# Altium PCB THERMO_RTD_SENSOR_2CH.PcbDoc (part 3 of 3)
Units mm, origin at the board's own origin, x right, y up, seen from the top; angles counter-clockwise.
Board outline 24 x 76.5 mm, 4 copper layers (L1, P2, L3, L4), stack 1.512 mm thick; 154 components, 120 nets, 487 pads, 253 vias.
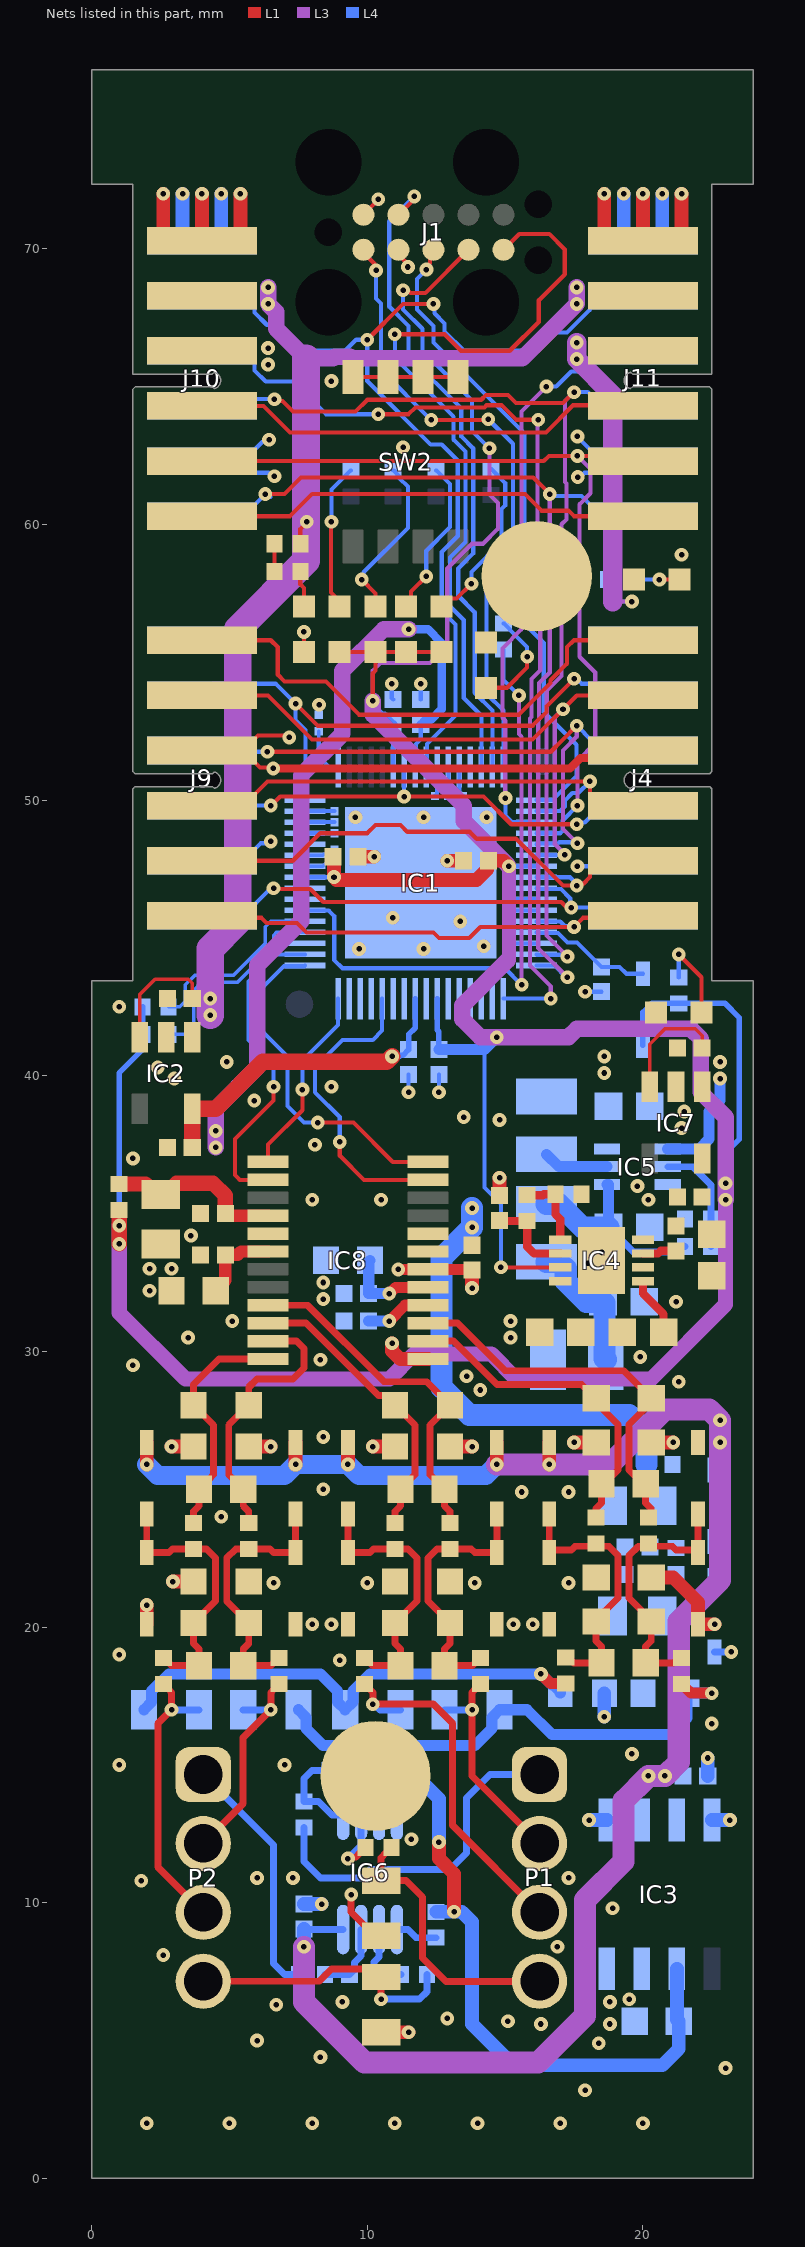
[diagram p4: the nets of this part, all layers, seen from the top]

## Via types
v1: diameter 0.5, hole 0.2, L1 to L4, tented both sides, 253 vias

## Nets (pads, with @x,y where several pads share a name; then routed paths per layer and width w, separated by ;. In a path a pad name is that pad's centre, name@x,y a point inside that pad or via, vN(x,y) a via of type N, cw(c..) or ccw(c..) an arc to the next point about the centre after c; other vN are vias at no path point) (continued)
GND: C1.1 C2.1 C3.1 C4.1 C5.1 C6.1 C7.1 C8.1 C9.1 C10.2 C11.1 C12.1 C13.1 C14.1 C15.1 C16.1 C17.1 C18.1 C19.1 C20.1 C23.2 C24.2 C25.2 C26.2 C28.2 C29.2 C32.1 C33.1 C34.2 C35.2 C36.1 C37.1 C38.2 C39.2 C40.2 C43.2 C44.2 C45.2 C46.1 C47.1 C48.2 C49.2 C52.1 C53.1 C231.1 C232.1 D3.2 D6.2 D7.2 D10.2 D11.2 D14.2 D15.2 IC1.65 IC2.2 IC3.1 IC3.4 IC3.7 IC3.8 IC4.4 IC4.9 IC5.3 IC6.4 IC7.2 IC8.1 IC8.6 IC8.17 J1.2 J1.10 J4.1 J4.5 J4.9 J9.1 J9.5 J9.9 J10.7 J10.11 J11.7 J11.11 LD1.1 LD26.1 LD27.1 LD28.1 MP1.1 MP2.1 NT1.2 NT2.2 NT3.2 NT4.2 NT5.2 NT6.2 NT7.2 NT8.2 NT9.2 NT10.2 NT11.2 NT12.2 R5.1 R8.1 R10.1 R16.1 R24.2 SW2.5 SW2.6 SW2.7 SW2.8 | length 74.5
  L1 w0.15: J9.9@4,51.8 J9.9@5.5,51.8 ; v1(6.585,51.15) 6.546,51.19 6.11,51.19 J9.9@5.5,51.8 ; v1(7.167,52.274) 7.104,52.338 6.038,52.338 J9.9@5.5,51.8 ; LD27.1@7.7,55.375 v1(7.7,56.1) ; SW2.8@9.485,65.35 SW2.5@13.295,65.35
  L1 w0.152: J1.10@9.86,71.235 9.86,71.247 10.4,71.787 v1(10.4,71.8) ; J1.2@11.13,69.965 11.13,69.79 11.409,69.511 11.409,69.407 v1(11.476,69.34)
  L1 w0.25: v1(9.414,10.295) 9.414,9.661 10.275,8.8 R10.1@10.5,8.8
  L1 w0.3: v1(6.585,51.15) 17.35,51.15 17.732,51.532 19.732,51.532 J4.9@20,51.8
  L1 w0.4: v1(11.125,32.975) IC8.6@12.2,32.975 13.775,32.975 C43.2@13.8,32.95
  L1 w0.5: D11.2@2,20.1 v1(2,20.8) ; v1(2.9,26.55) C47.1@3.7,26.55 ; v1(2.95,21.65) C46.1@3.7,21.65 ; C40.2@5.7,26.55 v1(6.5,26.55) ; C1.1@9.662,47.947 v1(10.253,47.947) ; v1(10.2,26.55) C33.1@11,26.55 ; R16.1@10.5,5.3 v1(11.5,5.3) ; v1(10.9,30.3) 10.9,30.018 11.193,29.725 IC8.1@12.2,29.725 ; v1(12.901,47.8) C3.1@13.493,47.8 ; C29.2@13,26.55 v1(13.8,26.55) ; v1(13.8,32.3) C43.2@13.8,32.95 ; C18.1@14.8,35.65 v1(14.8,36.3) ; v1(17.5,26.7) C53.1@18.3,26.7 ; C48.2@20.3,21.8 21.1,21.8 22,20.9 D14.2@22,20.1 v1(22.6,20.1) ; C49.2@20.3,26.7 v1(21.1,26.7)
  L4 w0.15: J9.5@4,47.8 5.5,47.8 6.133,48.433 6.427,48.433 v1(6.494,48.5) ; v1(10.888,54.224) 10.888,53.702 C4.1@10.94,53.65 ; v1(11.5,39.4) C232.1@11.5,40.05 ; C5.1@11.94,53.65 v1(11.94,54.224) ; v1(12.6,39.4) C2.1@12.6,40.05 ; v1(17.623,47.6) 19.8,47.6 J4.5@20,47.8 ; v1(17.9,43.05) C6.1@18.5,43.05
  L4 w0.152: v1(6.439,63.076) 6.373,63.009 6.209,63.009 5.5,62.3 J10.11@4,62.3 4.424,61.876 6.412,61.876 6.538,61.75 v1(6.632,61.75) ; v1(8.252,53.463) v1@8.318,53.396 ; v1(17.626,63.191) 17.626,63.174 18.5,62.3 J11.11@20,62.3 19.576,61.876 17.882,61.876 17.726,61.72 v1(17.632,61.72)
  L4 w0.25: D3.2@22.6,19.1 v1(23.2,19.1)
  L4 w0.5: J10.7@3.3,70.3 v1(3.3,72) ; J10.7@4.7,70.3 v1(4.7,72) ; C17.1@7.7,9.95 v1(8.35,9.95) ; v1(18.045,13) IC3.1@18.695,13 ; v1(18.6,16.75) R24.2@18.6,17.6 ; J11.7@19.3,70.3 v1(19.3,72) ; J11.7@20.7,70.3 v1(20.7,72) ; C10.2@22.35,14.6 v1(22.35,15.25) ; IC3.4@22.505,13 v1(23.155,13)
  other v1: 2,2 5,2 8,2 11,2 14,2 17,2 20,2 17.9,3.2 23,4 8.3,4.4 18.4,4.9 6,5 16.3,5.6 18.8,5.6 15.1,5.7 12.9,5.8 6.7,6.3 9.1,6.4 18.8,6.4 19.5,6.5 2.6,8.1 16.9,8.4 18.9,9.8 1.8,10.8 6,10.9 7.3,10.9 17.3,10.9 11.6,12.3 1,15 7,15 19.6,15.4 22.5,16.5 9,18.8 1,19 8,20.1 8.7,20.1 15.3,20.1 16,20.1 6.6,21.6 10,21.6 13.9,21.6 17.3,21.6 4.7,24 15.6,24.9 17.3,24.9 8.4,25 8.4,26.9 14.1,28.6 21.3,28.9 13.6,29.1 1.5,29.5 8.3,29.7 19.9,29.8 3.5,30.5 5.1,31.1 21.2,31.8 8.4,31.9 2.1,32.2 8.4,32.5 2.1,33 2.9,33 18,33.2 19,33.2 18.5,33.6 3.6,34.2 8,35.5 10.5,35.5 20.2,35.5 19.8,36 1.5,37 8.1,37.5 21.4,38.1 14.8,38.4 13.5,38.5 21.5,38.7 5.9,39.1 8.7,39.6 3,39.9 2.4,40.3 4.9,40.5 1,42.5 9.702,44.599 12.044,44.599 14.227,44.7 13.375,45.6 10.92,45.73 9.568,49.376 12.044,49.376 14.33,49.376 21.4,58.9 11.3,62.8 8.7,65.2
HSPI_AD0: IC1.22 J4.8 J9.8 | length 23.9
  L1 w0.15: J9.8@4,53.8 6.4,53.8 8,52.2 16,52.2 17.6,53.8 J4.8@20,53.8
  L3 w0.15: v1(17.1,53.3) 16.8,53 16.8,48.409 17.155,48.054 v1(17.155,48.018)
  L4 w0.15: IC1.22@16.14,48 16.149,48.009 17.146,48.009 v1(17.155,48.018)
HSPI_AD1: IC1.18 J4.10 J9.10 | length 19.5
  L1 w0.152: J9.10@4,49.8 5.5,49.8 6.377,50.677 v1(18.076,50.677) ; v1@18.075,50.65 18.076,50.649 18.076,50.224 18.5,49.8 J4.10@20,49.8
  L4 w0.152: IC1.18@16.14,49.6 16.998,49.6 17.17,49.772 17.17,49.988 17.435,50.253 17.651,50.253 v1@18.075,50.677
HSPI_AD2: IC1.28 J4.12 J9.12 | length 18.1
  L1 w0.152: J9.12@4,45.8 4.07,45.73 6.163,45.73 6.346,45.547 7.447,45.547 7.794,45.2 12.4,45.2 12.6,45 13.7,45 14.1,45.4 v1(17.5,45.4) 17.83,45.73 19.93,45.73 J4.12@20,45.8
  L4 w0.152: IC1.28@16.14,45.6 17,45.6 17.164,45.436 17.464,45.436 v1(17.5,45.4)
HSPI_AD3: IC1.21 J4.3 J9.3 | length 23
  L1 w0.152: v1(6.377,51.755) 16.655,51.755 17.085,52.185 v1(17.6,52.7)
  L3 w0.15: v1(17.6,52.7) 17.6,52.3 17.1,51.8 17.1,48.958 v1(17.625,48.433)
  L4 w0.15: v1(17.6,52.7) 17.62,52.7 17.883,52.437 17.883,52.417 18.5,51.8 J4.3@20,51.8
  L4 w0.152: J9.3@4,51.8 4.045,51.755 v1(6.377,51.755) ; IC1.21@16.14,48.4 16.164,48.424 16.92,48.424 16.967,48.471 17.587,48.471 v1(17.625,48.433)
HSPI_CLK: IC1.7 J4.4 J9.4 | length 16.5
  L1 w0.152: v1(6.494,49.8) 6.517,49.8 6.844,50.127 v1(11.334,50.127) 14.22,50.127 15.224,49.123 v1(17.6,49.123)
  L4 w0.152: J9.4@4,49.8 v1(6.494,49.8) ; v1(11.334,50.127) 11.337,50.13 11.337,51.197 IC1.7@11.34,51.2 ; v1(17.6,49.123) 17.667,49.19 17.89,49.19 18.5,49.8 J4.4@18.624,49.8
HSPI_CS0: IC1.25 J4.6 J9.6 | length 18.6
  L1 w0.152: v1(6.6,46.8) 6.627,46.773 7.93,46.773 8.404,46.3 17.037,46.3 17.17,46.167 17.333,46.167 v1(17.4,46.1)
  L4 w0.152: J9.6@4,45.8 5.5,45.8 6.433,46.733 6.533,46.733 v1(6.6,46.8) ; IC1.25@16.14,46.8 16.164,46.776 17.024,46.776 17.364,46.436 17.364,46.261 17.393,46.232 v1@17.4,46.232 ; v1@17.437,46.232 v1@17.4,46.232 ; J4.6@20,45.8 18.5,45.8 18.2,46.1 v1(17.4,46.1) v1@17.4,46.232
HSPI_ID: IC1.64 J4.2 J9.2 | length 21.5
  L1 w0.152: v1(7.4,53.5) 8.2,52.7 16,52.7 16.5,53.2 16.5,53.4 v1(17.5,54.4)
  L4 w0.152: J9.2@4,53.8 4.424,54.224 6.676,54.224 v1(7.4,53.5) 7.4,52.9 7.759,52.541 7.759,50.024 7.74,50.005 IC1.64@7.74,50 ; v1(17.5,54.4) 17.594,54.4 17.77,54.224 19.576,54.224 J4.2@20,53.8
HSPI_Q: IC1.24 J4.11 J9.11 | length 19.5
  L1 w0.152: J9.11@4,47.8 7.295,47.8 8.295,48.8 10,48.8 10.3,49.1 11.2,49.1 11.447,48.853 13.715,48.853 13.968,48.6 15.4,48.6 17.1,46.9 v1(17.6,46.9) 17.667,46.967 17.837,46.967 18.076,47.206 18.076,47.376 18.5,47.8 J4.11@20,47.8
  L4 w0.152: IC1.24@16.14,47.2 17.349,47.2 17.6,46.949 v1(17.6,46.9)
HSPI_sAD0: IC1.31 J10.10 J11.10 | length 39.4
  L1 w0.15: v1(6.632,64.545) 6.699,64.478 6.922,64.478 7.3,64.1 9.577,64.1 10,64.523 14.134,64.523 14.311,64.7 15.1,64.7 15.4,64.4 17.1,64.4 v1(17.5,64.8)
  L3 w0.15: v1(17.26,44.325) 16.5,45.085 16.5,52.774 16.508,52.782 16.508,53.968 17.048,54.507 17.048,60.009 17.223,60.184 17.223,61.489 17.171,61.541 17.171,64.471 v1(17.5,64.8)
  L4 w0.15: J10.10@4,64.3 4.245,64.545 v1(6.632,64.545) ; IC1.31@16.14,44.4 16.151,44.389 17.196,44.389 v1(17.26,44.325) ; v1(17.5,64.8) 18,64.8 18.5,64.3 J11.10@20,64.3
HSPI_sAD1: IC1.32 J10.12 J11.12 | length 36.8
  L1 w0.15: v1(6.3,61.1) 7,61.1 7.6,61.7 16.021,61.7 v1(16.621,61.1)
  L3 w0.152: v1(16.621,61.1) 16.621,54.635 16.23,54.244 16.23,52.898 16.2,52.867 16.2,44.635 v1(17.26,43.575)
  L4 w0.15: J10.12@4,60.3 5.5,60.3 v1(6.3,61.1) ; v1(16.621,61.1) 16.688,61.033 17.767,61.033 18.5,60.3 J11.12@20,60.3
  L4 w0.152: v1(6.3,61.1) 6.394,61.1 v1@6.494,61 ; IC1.32@16.14,44 16.79,44 17.215,43.575 v1(17.26,43.575)
Iexc_0: P1.1 R6.2 | length 12.4
  L4 w0.25: R6.2@7.7,12.73 7.7,11.5 8.3,10.9 9.8,10.9 10.1,11.2 13,11.2 13.6,11.8 13.6,13.8 14.45,14.65 P1.1@15.85,14.65
Iexc_1: P2.1 R11.2 | length 9
  L4 w0.25: 6.6,10.8 6.6,7.8 7,7.4 R11.2@7.53,7.4
  L4 w0.254: P2.1@4.05,14.65 6.6,12.1 6.6,10.8
Iexc_RET_0: P1.4 R9.2 R10.2 | length 9.9
  L1 w0.25: R9.2@10.87,12 10.87,11.98 10.705,11.815 10.685,11.815 10.5,11.63 R10.2@10.5,10.8 11.4,10.8 12,10.2 12,8 12.85,7.15
  L1 w0.254: 12.85,7.15 P1.4@16.25,7.15
Iexc_RET_1: P2.4 R15.2 R16.2 | length 9
  L1 w0.25: P2.4@5.05,7.15 8.25,7.15 8.7,7.6 10.5,7.6 v1@10.5,6.6
  L4 w0.25: v1(10.5,6.5) 11.9,6.5 12.17,6.77 R15.2@12.17,7.4
IO0: IC1.34
IO1: IC1.35
IO2: IC1.36
IO3: IC1.37
IO4: IC1.38
IO5: IC1.40
IO6: IC1.42
IO7: IC1.43
MODBUS_A: J10.4 J11.4 | length 16.8
  L1 w0.152: J10.4@4,64.3 6.236,64.3 7.195,63.341 16.482,63.341 17.467,64.326 19.974,64.326 J11.4@20,64.3
MODBUS_B: J10.6 J11.6 | length 16.7
  L1 w0.152: J10.6@4,60.3 7.2,60.3 8,61.1 15.725,61.1 16.325,60.5 17.3,60.5 17.5,60.3 J11.6@20,60.3
NetC15_2: C15.2 IC5.4 L1.1 R3.2 | length 7.4
  L4 w0.25: C15.2@18.75,34.5 19.65,33.6 20.9,33.6 21.1,33.8 R3.2@21.53,33.8
  L4 w0.4: IC5.4@18.7,36.05 18.75,36.05 C15.2@18.75,34.5
  L4 w0.8: L1.1@16.5,35.35 16.95,35.35 17.8,34.5 C15.2@18.75,34.5
NetC16_2: C16.2 L1.2 L3.1 | length 5.1
  L4 w0.8: L1.2@16.5,33.25 16.95,33.25 17.2,33 17.2,32.55 17.95,31.8 C16.2@18.55,31.8 18.6,31.75 18.6,29.75 L3.1@18.65,29.7
NetC18_2: C18.2 IC4.6 R4.2 | length 3.2
  L1 w0.3: C18.2@14.8,34.75 14.82,34.73 R4.2@15.8,34.73 15.8,33.8 16.05,33.55 IC4.6@17,33.55
NetC19_2: C19.2 IC4.3 | length 1.2
  L1 w0.3: IC4.3@20,33.55 20.55,33.55 20.65,33.65 C19.2@21.2,33.65
NetC20_2: C20.2 IC4.1 | length 2.2
  L1 w0.3: IC4.1@20,32.55 20,32.1 20.75,31.35 C20.2@20.75,30.7
NetC21_1: C21.1 IC6.2 R9.1 | length 4.3
  L1 w0.25: v1(9.3,11.6) 9.348,11.648 9.578,11.648 9.745,11.815 9.765,11.815 9.93,11.98 R9.1@9.93,12
  L4 w0.25: v1(9.3,11.6) 9.775,12.075 IC6.2@9.775,13.175 9.775,14.125 9.55,14.35 C21.1@9.55,14.8
NetC21_2: C21.2 IC6.1 R6.1 | length 3.5
  L4 w0.25: C21.2@8.65,14.8 8,14.8 7.7,14.5 R6.1@7.7,13.67 8.23,13.67 8.725,13.175 IC6.1@9.125,13.175
NetC22_1: C22.1 IC6.6 R15.1 | length 2.7
  L4 w0.25: IC6.6@10.425,9.025 10.425,8.025 10.25,7.85 C22.1@10.25,7.4 R15.1@11.23,7.4
NetC22_2: C22.2 IC6.7 R11.1 | length 2.7
  L4 w0.25: R11.1@8.47,7.4 C22.2@9.35,7.4 9.535,7.585 9.535,7.835 9.775,8.075 IC6.7@9.775,9.025
NetC28_1: C28.1 C30.1 D4.2 D6.1 R19.2 R20.1 | length 9.8
  L1 w0.25: R19.2@14.1,18.87 14.08,18.87 13.81,18.6 C30.1@12.8,18.6 12.8,19.2 13,19.4 C28.1@13,20.15 12.2,20.95 12.2,22.5 12.53,22.83 R20.1@13,22.83 13.77,22.83 13.9,22.7 D6.1@14.7,22.7 D4.2@14.7,24.1
NetC29_1: C29.1 C31.1 IC8.21 R20.2 | length 13
  L1 w0.25: IC8.21@6.4,31.675 7.825,31.675 10.6,28.9 12.15,28.9 C29.1@13,28.05 12.273,27.323 12.273,27.129 12.273,25.527 12.45,25.35 C31.1@12.8,25 12.8,24.4 13,24.2 R20.2@13,23.77
NetC30_2: C30.2 C32.2 D5.2 D7.1 R21.2 R22.1 | length 9.8
  L1 w0.25: D5.2@9.3,24.1 D7.1@9.3,22.7 10.1,22.7 10.23,22.83 R22.1@11,22.83 11.47,22.83 11.8,22.5 11.8,20.95 C32.2@11,20.15 11,19.4 11.2,19.2 C30.2@11.2,18.6 10.19,18.6 9.92,18.87 R21.2@9.9,18.87
NetC31_2: C31.2 C33.2 IC8.22 R22.2 | length 10.7
  L1 w0.25: IC8.22@6.4,31.025 7.775,31.025 10.4,28.4 10.65,28.4 11.727,27.323 11.727,27.129 11.727,25.527 11.55,25.35 C31.2@11.2,25 11.2,24.4 11,24.2 R22.2@11,23.77
NetC34_1: C34.1 C36.2 IC8.5 | length 3.5
  L1 w0.4: v1(10.8,32.1) 11.025,32.325 IC8.5@12.2,32.325
  L4 w0.4: C36.2@10.1,33.3 10.053,33.253 10.053,32.103 C34.1@10.05,32.1 v1(10.8,32.1)
NetC35_1: C35.1 IC8.4 | length 2.4
  L1 w0.4: v1(10.8,31.1) 11.375,31.675 IC8.4@12.2,31.675
  L4 w0.4: C35.1@10.05,31.1 v1(10.8,31.1)
NetC37_2: C37.2 C38.1 IC8.18 | length 3
  L1 w0.45: C37.2@4.5,32.2 4.5,32.225 4.85,32.575 C38.1@4.85,33.5 5.3,33.5 5.425,33.625 IC8.18@6.4,33.625
NetC39_1: C39.1 C41.1 D8.2 D10.1 R28.2 R29.1 | length 9.8
  L1 w0.25: R28.2@6.8,18.87 6.78,18.87 6.51,18.6 C41.1@5.5,18.6 5.5,19.2 5.7,19.4 C39.1@5.7,20.15 4.9,20.95 4.9,22.5 5.23,22.83 R29.1@5.7,22.83 6.47,22.83 6.6,22.7 D10.1@7.4,22.7 D8.2@7.4,24.1
NetC40_1: C40.1 C42.1 IC8.23 R29.2 | length 9.9
  L1 w0.25: R29.2@5.7,23.77 5.7,24.2 5.5,24.4 C42.1@5.5,25 5.15,25.35 4.973,25.527 4.973,27.129 4.973,27.323 C40.1@5.7,28.05 5.7,28.7 6,29 7.3,29 7.7,29.4 7.7,30.1 7.425,30.375 IC8.23@6.4,30.375
NetC41_2: C41.2 C46.2 D9.2 D11.1 R31.2 R34.1 | length 9.8
  L1 w0.25: D9.2@2,24.1 D11.1@2,22.7 2.8,22.7 2.93,22.83 R34.1@3.7,22.83 4.17,22.83 4.5,22.5 4.5,20.95 C46.2@3.7,20.15 3.7,19.4 3.9,19.2 C41.2@3.9,18.6 2.89,18.6 2.62,18.87 R31.2@2.6,18.87
NetC42_2: C42.2 C47.2 IC8.24 R34.2 | length 8.7
  L1 w0.25: R34.2@3.7,23.77 3.7,24.2 3.9,24.4 C42.2@3.9,25 4.25,25.35 4.427,25.527 4.427,27.129 4.427,27.323 C47.2@3.7,28.05 3.7,28.8 4.625,29.725 IC8.24@6.4,29.725
NetC48_1: C48.1 C50.2 D12.2 D14.1 R36.2 R37.1 | length 9.8
  L1 w0.25: R36.2@21.4,18.97 21.38,18.97 21.11,18.7 C50.2@20.1,18.7 20.1,19.3 20.3,19.5 20.3,20.25 19.5,21.05 19.5,22.6 19.83,22.93 20.3,22.93 21.07,22.93 21.2,22.8 22,22.8 D12.2@22,24.2
NetC49_1: C49.1 C51.2 IC8.3 R37.2 | length 14.2
  L1 w0.25: IC8.3@12.2,31.025 13.275,31.025 15,29.3 19.3,29.3 19.925,28.675 19.925,28.65 20.275,28.3 C49.1@20.3,28.3 ; R37.2@20.3,23.87 20.3,24.3 20.1,24.5 20.1,25.1 19.75,25.45 19.5,25.7 19.5,27.35 C49.1@20.3,28.15
NetC50_1: C50.1 C52.2 D13.2 D15.1 R38.2 R39.1 | length 9.8
  L1 w0.25: D13.2@16.6,24.2 16.6,22.8 17.4,22.8 17.53,22.93 18.3,22.93 18.77,22.93 19.1,22.6 19.1,21.05 18.3,20.25 18.3,19.5 18.5,19.3 C50.1@18.5,18.7 17.49,18.7 17.22,18.97 R38.2@17.2,18.97
NetC51_1: C51.1 C53.2 IC8.2 R39.2 | length 11.9
  L1 w0.25: IC8.2@12.2,30.375 13.125,30.375 14.7,28.8 17.779,28.8 17.925,28.654 17.925,28.65 18.275,28.3 C53.2@18.3,28.3 ; R39.2@18.3,23.87 18.3,24.3 18.5,24.5 18.5,25.1 18.85,25.45 19.1,25.7 19.1,27.35 C53.2@18.3,28.15
NetIC4_5: IC4.5 R4.1 R8.2 | length 2.8
  L1 w0.3: R4.1@15.8,35.67 16.37,35.67 16.4,35.7 R8.2@16.83,35.7 16.83,34.97 17,34.8 IC4.5@17,34.05
NetIC5_2: IC5.2 R3.1 R5.2 | length 4.1
  L4 w0.25: IC5.2@20.9,36.7 21.8,36.7 22.47,36.03 R5.2@22.47,34.8 R3.1@22.47,33.8
NetIC5_5: IC5.5 L2.2 | length 2.4
  L4 w0.4: L2.2@16.5,37.15 16.95,36.7 IC5.5@18.7,36.7
NetIC6_3: IC6.3 R7.2 | length 1.7
  L4 w0.25: IC6.3@10.425,13.175 10.425,14.125 10.63,14.33 R7.2@10.63,14.8
NetIC6_5: IC6.5 R14.2 | length 1.5
  L4 w0.25: IC6.5@11.075,9.025 11.475,9.025 11.77,8.73 R14.2@12.5,8.73
NetLD1_2: LD1.2 R1.1 | length 3.8
  L1 w0.15: LD1.2@14.3,54.075 15.062,54.075 15.8,54.813 v1(15.8,55.2)
  L4 w0.15: R1.1@14.94,56.411 14.96,56.411 15.175,56.196 15.175,56.176 15.8,55.551 v1(15.8,55.2)
NetLD18_1: LD18.1 R26.1 | length 6.3
  L1 w0.15: LD18.1@12.7,57.025 12.983,57.308 13.235,57.308 v1(13.776,57.85)
  L4 w0.15: v1(13.776,57.85) 13.776,58.276 14.873,59.373 14.873,60.558 15.003,60.688 15.003,61.435 15.003,61.51 14.511,62.002 R26.1@14.491,62.002
NetLD19_1: LD19.1 R27.1 | length 5.8
  L1 w0.15: LD19.1@11.4,57.025 11.586,57.211 11.586,57.562 v1(12.14,58.116)
  L4 w0.15: v1(12.14,58.116) 12.14,59.04 13.004,59.904 13.004,60.645 13.005,60.646 13.005,61.468 12.513,61.96 R27.1@12.493,61.96
NetLD20_1: LD20.1 R32.1 | length 6.1
  L1 w0.15: v1(9.8,58) 10.3,57.5 LD20.1@10.3,57.025
  L4 w0.15: v1(9.8,58) 9.867,58.067 9.867,58.267 11.474,59.874 11.474,61.371 11.175,61.67 11.175,61.745 10.96,61.96 R32.1@10.94,61.96
NetLD21_1: LD21.1 R33.1 | length 5.4
  L1 w0.15: v1(8.7,60.1) 8.69,60.09 8.69,57.535 LD21.1@9.18,57.045
  L4 w0.15: v1(8.7,60.1) 8.7,61.266 9.394,61.96 R33.1@9.414,61.96
NetLD26_2: LD26.2 R46.1 | length 3.3
  L1 w0.15: v1(21.3,44.4) 22.125,43.575 LD26.2@22.125,42.3
  L4 w0.15: R46.1@21.3,43.57 v1(21.3,44.4)
NetLD27_2: LD27.2 R48.1 | length 1.3
  L1 w0.15: R48.1@7.57,58.3 7.57,57.83 7.7,57.7 LD27.2@7.7,57.025
NetLD28_2: LD28.2 R2.2 | length 1.7
  L1 w0.15: v1(20.6,58) LD28.2@21.325,58
  L4 w0.15: R2.2@19.67,58 v1(20.6,58)
NetR47_1: R47.1 R48.2 | length 1
  L1 w0.15: R48.2@6.63,58.3 R47.1@6.63,59.3
P1V2_REFC: C11.2 IC3.6 R7.1 R14.1 | length 22.2
  L1 w0.5: v1(12.6,12.2) 12.6,11.6 13.15,11.05 v1(13.15,9.67)
  L4 w0.5: R7.1@11.57,14.8 11.57,14.78 11.61,14.74 11.63,14.74 12.6,13.77 v1(12.6,12.2) ; R14.1@12.5,9.67 v1(13.15,9.67) 13.43,9.67 13.8,9.3 13.8,5.6 15.3,4.1 20.7,4.1 21.3,4.7 C11.2@21.3,5.7 21.235,5.765 IC3.6@21.235,7.6
P1V8: C5.2 C9.2 C232.2 IC1.8 IC1.41 IC2.5 | length 40.7
  L1 w0.6: C9.2@3.65,37.4 IC2.5@3.65,38.8 4.5,38.8 6.2,40.5 10.7,40.5 v1(10.9,40.7)
  L3 w0.6: v1(4.5,37.4) v1(4.5,38) 4.5,38.8 6,40.3 6,44 7.6,45.6 7.6,50.9 9.1,52.4 9.1,54.7 10.6,56.2 v1(11.5,56.2)
  L4 w0.152: IC1.8@11.74,51.2 11.764,51.224 11.764,52.035 11.94,52.211 C5.2@11.94,52.75
  L4 w0.2: v1(10.9,40.7) 11.173,40.7 11.213,40.74 11.29,40.74 C232.2@11.5,40.95 11.5,41.5 11.74,41.74 IC1.41@11.74,42.8
  L4 w0.3: v1(11.5,56.2) 12.2,56.2 12.7,55.7 12.7,53.3 12.31,52.91 12.1,52.91 C5.2@11.94,52.75
P3V3: C1.2 C2.2 C3.2 C4.2 C7.2 D1.1 IC1.6 IC1.23 IC1.39 IC1.57 IC4.7 IC7.5 J1.4 LD18.2 LD19.2 LD20.2 LD21.2 R30.2 R40.1 R41.1 R46.2 | length 137.8
  L1 w0.15: LD21.2@9,55.375 LD20.2@10.3,55.375 LD19.2@11.4,55.375 LD18.2@12.7,55.375 ; v1(10.2,53.6) 10.2,54.6 10.3,54.7 LD20.2@10.3,55.395 ; v1(14.85,33.05) IC4.7@17,33.05
  L1 w0.152: v1(11.3,68.5) 11.367,68.433 11.53,68.433 11.563,68.4 12.105,68.4 J1.4@13.67,69.965
  L1 w0.5: C3.2@14.393,47.8 14.94,47.8 v1(15.14,47.6)
  L1 w0.508: C1.2@8.762,47.947 8.792,47.916 v1(8.792,47.206) 8.889,47.109 13.96,47.109 14.337,47.485 C3.2@14.337,47.744
  L1 w0.55: v1(1,33.9) v1(1,34.565) R30.2@1,35.13
  L3 w0.15: v1(10.2,53.6) 10.2,54.7 10.48,54.98 12.28,54.98 12.9,55.6 12.9,58.4 13.8,59.3 14.2,59.3 14.747,59.847 14.747,60.778 14.43,61.095
  L3 w0.152: 14.43,61.095 v1(14.43,62.761)
  L3 w0.516: 15.14,44.24 v1(15.14,47.6)
  L3 w0.55: v1(1,34.565) v1(1,33.9) 1,31.4 3.4,29 10.8,29 11.7,29.9 14.5,29.9 15.4,29 20.3,29 23,31.7 v1(23,35.5)
  L3 w0.6: v1(10.2,53.6) 10.2,53.1 13.5,49.8 13.5,49.24 v1@15.098,47.642 ; 15.098,44.198 13.449,42.549 13.449,42.051 14.1,41.4 v1(14.7,41.4) 17.3,41.4 17.6,41.7 21.749,41.7 22.1,41.349 22.1,39.4 23,38.5 v1(23,36.1) v1(23,35.5)
  L4 w0.15: IC1.57@7.74,47.2 7.743,47.203 8.79,47.203 v1(8.792,47.206) ; IC1.6@10.94,51.2 C4.2@10.94,52.75 ; 14.25,40.95 14.25,35.95 14.85,35.35 v1(14.85,33.05) ; v1(15.14,47.6) IC1.23@16.14,47.6
  L4 w0.152: v1(11.3,68.5) 11.3,67.8 12,67.1 12,66.3 13.8,64.5 13.8,63.392 v1(14.43,62.761)
  L4 w0.2: v1(1,34.565) 1,40.1 1.85,40.95 R40.1@1.85,42.5 ; IC1.39@12.54,42.8 12.54,41.66 12.6,41.6 C2.2@12.6,40.95 ; D1.1@20,41.1 20,42.3 20.33,42.63 R46.2@21.3,42.63 22.97,42.63 23.5,42.1 23.5,37.7 23,37.2 v1(23,36.1) v1(23,35.5)
  L4 w0.3: v1(10.2,53.6) 10.2,53.378 10.515,53.063 10.627,53.063 C4.2@10.94,52.75
  L4 w0.4: C2.2@12.6,40.95 14.25,40.95 v1(14.7,41.4)
P3V3DVDD: C44.1 C45.1 IC8.16 R30.1 | length 6.6
  L1 w0.45: C44.1@4.85,35 4.925,34.925 IC8.16@6.4,34.925
  L1 w0.55: R30.1@1,36.07 1.955,36.07 2.325,35.7 C45.1@2.5,35.7 2.675,35.7 3.075,36.1 4.4,36.1 4.85,35.65 C44.1@4.85,35
P5V0: C8.2 C14.2 C231.2 IC2.1 IC2.3 IC5.1 IC5.6 IC7.1 IC7.3 J10.2 J11.2 L2.1 R47.2 | length 53.1
  L1 w0.127: IC2.3@1.75,41.4 1.75,42.95 2.3,43.5 3.5,43.5 3.65,43.35 C8.2@3.65,42.8 ; IC7.3@20.25,39.6 20.25,41.15 20.8,41.7 21.9,41.7 22.15,41.45 C231.2@22.15,41
  L1 w0.15: R47.2@7.57,59.3 7.57,59.837 7.8,60.067 v1(7.8,60.1)
  L3 w0.6: v1(6.4,68.6) v1(6.4,68) 6.692,67.708 6.692,67.108 7.777,66.023 8.766,66.023 8.82,66.077 9.38,66.077 9.434,66.023 15.623,66.023 v1(17.6,68) v1(17.6,68.6)
  L3 w1: v1(4.3,42.2) v1(4.3,42.8) 4.3,44.6 5.3,45.6 5.3,56.2 7.777,58.677 7.777,66.023
  L4 w0.4: IC5.1@20.9,37.35 22.05,37.35 22.4,37.7 22.4,38.7 22.8,39.1 v1(22.8,39.9)
  other v1: 18.6,40.1 22.8,40.5 18.6,40.7
P5V0A: C10.1 C13.2 C17.2 D2.1 D4.1 D5.1 D8.1 D9.1 D12.1 D13.1 IC3.2 IC3.3 IC4.2 IC6.8 R13.2 | length 66.3
  L1 w0.5: v1(2,25.9) D9.1@2,26.7 ; v1(7.4,25.9) D8.1@7.4,26.7 ; v1(9.3,25.9) D5.1@9.3,26.7 ; v1(14.7,25.9) D4.1@14.7,26.7 ; v1(16.6,25.9) D13.1@16.6,26.7
  L3 w0.8: v1(7.7,8.4) 7.7,6.4 9.9,4.2 16.2,4.2 17.9,5.9 17.9,10.1 19.3,11.5 19.3,13.7 v1(20.2,14.6) v1(20.8,14.6) 21.3,15.1 21.3,20.2 22.8,21.7 v1(22.8,26.7) v1(22.8,27.5) 22.4,27.9 20.8,27.9 18.8,25.9 v1(16.6,25.9) v1(14.7,25.9)
  L4 w0.25: C17.2@7.7,9.05 7.725,9.025 IC6.8@9.125,9.025
  L4 w0.5: v1(7.7,8.4) C17.2@7.7,9.05
  L4 w0.7: v1(2,25.9) 2.4,25.5 7,25.5 v1(7.4,25.9) v1(9.3,25.9) 9.7,25.5 14.3,25.5 v1(14.7,25.9)
P5V0AVDD: C24.1 C25.1 C43.1 D2.2 D3.1 IC8.7 IC8.8 R12.2 R13.1 | length 16.2
  L4 w0.8: v1(13.8,35.2) v1(13.8,34.5) 12.7,33.4 12.7,28.7 13.7,27.7 19.5,27.7 20.13,27.07 R13.1@20.13,25.9
P6V0A: C12.2 IC4.8 L3.2
  other v1: 15.2,30.5 15.2,31.1
P12V0: J10.1 J10.3 J11.1 J11.3 R2.1 | length 22.4
  L1 w0.5: J10.1@2.6,70.3 v1(2.6,72) ; J10.1@4,70.3 v1(4,72) ; J10.1@5.4,70.3 v1(5.4,72) ; J11.1@18.6,70.3 v1(18.6,72) ; J11.1@20,70.3 v1(20,72) ; J11.1@21.4,70.3 v1(21.4,72)
  L3 w0.15: 18.9,57.2 v1(19.6,57.2)
  L3 w0.7: v1(17.6,66.6) v1(17.6,66) 18.9,64.7 18.9,57.2
  L4 w0.15: R2.1@18.73,58 18.73,57.47 19,57.2 v1(19.6,57.2)
  other v1: 6.4,65.8 6.4,66.4
PROJECT_ID0: IC1.55
PROJECT_ID1: IC1.56
PROJECT_ID2: IC1.58 NT8.1 | length 1.1
  L4 w0.127: IC1.58@7.74,47.6 8.39,47.6 8.5,47.71 8.569,47.71 8.609,47.75 NT8.1@8.814,47.75
PROJECT_ID3: IC1.59 NT12.1 | length 1.2
  L4 w0.127: IC1.59@7.74,48 8.39,48 8.427,48.037 8.531,48.037 8.585,48.091 8.653,48.091 8.676,48.114 8.728,48.114 NT12.1@8.814,48.2
PROJECT_ID4: IC1.60
PROJECT_ID5: IC1.61 NT9.1 | length 1.1
  L4 w0.15: IC1.61@7.74,48.8 NT9.1@8.814,48.8
PROJECT_ID6: IC1.62 NT10.1 | length 1.1
  L4 w0.15: IC1.62@7.74,49.2 NT10.1@8.814,49.2
PROJECT_ID7: IC1.63 NT11.1 | length 1.1
  L4 w0.15: IC1.63@7.74,49.6 NT11.1@8.814,49.6
RESETn_I: IC1.33 J10.9 | length 36.9
  L1 w0.15: v1(10.4,64) 11.5,64 11.746,64.246 14.248,64.246 14.329,64.326 14.874,64.326 15.4,63.8 v1(16.2,63.8)
  L3 w0.15: v1(16.2,63.8) 16.169,63.769 16.169,56.877 16.277,56.77 16.277,54.717 15.952,54.392 15.952,53.013 15.9,52.961 15.9,44 16.657,43.243 v1(16.657,42.8)
  L4 w0.15: J10.9@4,66.3 5.484,66.3 5.909,65.875 5.909,65.591 6.317,65.183 7.317,65.183 8.5,64 v1(10.4,64) ; IC1.33@14.94,42.8 v1(16.657,42.8)
RESETn_O: IC1.19 J11.9 | length 20.1
  L3 w0.15: v1(15.013,50.073) 15.007,50.079 15.007,52.88 14.9,52.987 14.9,55.5 15.6,56.2 15.6,64.1 v1(16.5,65)
  L4 w0.15: v1(15.013,50.073) 15.013,49.44 15.176,49.276 15.253,49.2 IC1.19@16.14,49.2 ; v1(16.5,65) 16.503,65.003 16.855,65.003 17.4,65.548 17.748,65.548 17.787,65.548 18.075,65.836 18.075,65.875 J11.9@18.5,66.3
REV_ID0: IC1.1 NT1.1 | length 1.8
  L4 w0.127: 8.24,52.147 NT1.1@8.24,52.5
  L4 w0.152: 8.24,52.147 8.24,51.56 8.6,51.2 IC1.1@8.94,51.2
REV_ID1: IC1.10 NT2.1 | length 0.4
  L4 w0.15: NT2.1@12.453,50.148 12.528,50.223 12.528,50.488 IC1.10@12.54,50.5
REV_ID2: IC1.11 NT3.1 | length 1.1
  L4 w0.15: NT3.1@12.94,50.148 IC1.11@12.94,51.2
REV_ID3: IC1.12 NT4.1 | length 0.9
  L4 w0.15: IC1.12@13.34,51.2 13.34,50.318 NT4.1@13.388,50.27
REV_ID4: IC1.13
REV_ID5: IC1.26 NT5.1 | length 1
  L4 w0.152: NT5.1@15.14,46.4 IC1.26@16.14,46.4
REV_ID6: IC1.27 NT6.1 | length 1
  L4 w0.152: NT6.1@15.14,46 IC1.27@16.14,46
REV_ID7: IC1.30 NT7.1 | length 1
  L4 w0.152: NT7.1@15.14,44.8 IC1.30@16.14,44.8
RSTn: C6.2 D1.2 IC1.29 | length 4.5
  L4 w0.15: 17.975,44.475 18.265,44.185 C6.2@18.5,43.95 19.15,43.95 19.4,43.7 D1.2@20,43.7
  L4 w0.152: IC1.29@16.14,45.2 16.164,45.176 16.924,45.176 17.263,44.837 17.613,44.837 17.975,44.475
SCL: IC1.9 J10.8 J11.8 | length 37.6
  L1 w0.152: v1(10,66.7) 11.3,68 v1(12.4,68)
  L4 w0.152: J10.8@4,68.3 5.485,68.3 5.909,67.876 5.909,67.691 6.354,67.246 6.65,67.246 7.597,66.3 9.197,66.3 9.597,66.7 v1(10,66.7) 10,65.2 12.3,62.9 12.7,62.9 13.283,62.317 13.283,60.531 13.283,60.53 13.283,59.583 12.7,59 12.7,56.873 13.2,56.373 13.2,53.076 12.164,52.04 12.164,51.224 IC1.9@12.14,51.2 ; v1(12.4,68) 12.434,67.966 12.434,67.662 12.8,67.295 12.8,67 13.5,66.3 16.2,66.3 16.863,66.963 17.248,66.963 18.076,67.792 18.076,67.876 18.5,68.3 J11.8@20,68.3
SDA: IC1.20 J10.5 J11.5 | length 31.8
  L1 w0.152: J10.5@4,62.3 16.4,62.3 16.587,62.487 v1(17.623,62.487) ; v1@17.661,62.449 17.7,62.487 19.813,62.487 J11.5@20,62.3
  L3 w0.152: v1(17.623,49.8) 17.623,51.423 18.269,52.069 18.269,54.631 17.7,55.2 17.7,60.731 18.1,61.131 18.1,62.01 v1(17.623,62.487)
  L4 w0.152: IC1.20@16.14,48.8 16.999,48.8 17.093,48.894 17.093,49.27 v1(17.623,49.8)
SENS0_N: P1.3 R21.1 R23.1 | length 13.3
  L1 w0.254: R21.1@9.9,17.93 9.92,17.93 10.083,17.767 10.083,17.747 10.2,17.63 v1(10.2,17.2) 12.4,17.2 13.1,16.5 13.1,12.8 P1.3@16.25,9.65
  L4 w0.254: v1(10.2,17.2) 10.267,17.2 10.467,17 R23.1@11.2,17
SENS0_P: P1.2 R17.1 R19.1 | length 7.9
  L1 w0.254: R19.1@14.1,17.93 14.08,17.93 13.917,17.767 13.917,17.747 13.8,17.63 v1(13.8,17) 13.8,14.6 P1.2@16.25,12.15
  L4 w0.254: R17.1@12.8,17 v1(13.8,17)
SENS1_N: P2.3 R31.1 R35.1 | length 10.3
  L1 w0.254: R31.1@2.6,17.93 2.62,17.93 2.783,17.767 2.783,17.747 2.9,17.63 v1(2.9,17) 2.4,16.5 2.4,11.3 P2.3@4.05,9.65
  L4 w0.254: v1(2.9,17) R35.1@3.9,17
SENS1_P: P2.2 R25.1 R28.1 | length 7.9
  L1 w0.254: P2.2@4.05,12.15 5.5,13.6 5.5,16 v1(6.5,17) 6.5,17.63 6.617,17.747 6.617,17.767 6.78,17.93 R28.1@6.8,17.93
  L4 w0.254: R25.1@5.5,17 v1(6.5,17)
SPI_CLK: IC1.48 IC8.13 | length 7
  L1 w0.15: IC8.13@6.4,36.875 6.4,37.5 7.648,38.748 v1(7.648,39.5)
  L4 w0.15: v1(7.648,39.5) 7.648,40.548 8.94,41.84 IC1.48@8.94,42.8
SPI_CS0: IC1.50 IC8.14 | length 11.7
  L1 w0.15: IC8.14@6.4,36.225 5.375,36.225 5.2,36.4 5.2,37.7 6.6,39.1 v1(6.6,39.6)
  L4 w0.15: v1(6.6,39.6) 6.6,40.4 5.7,41.3 5.7,43.425 6.675,44.4 IC1.50@7.74,44.4
SPI_CS1: IC1.51
SPI_CS2: IC1.52 R41.2 | length 7.5
  L4 w0.127: R41.2@2.79,41.5 3.4,41.5 3.7,41.8 3.7,43.1 4,43.4 5.3,43.4 6.6,44.7 6.6,45.1 6.7,45.2 IC1.52@7.74,45.2
SPI_CS3: IC1.53 R40.2 | length 6.9
  L4 w0.127: R40.2@2.79,42.5 3.2,42.5 3.4,42.7 3.4,43.3 3.754,43.654 5.154,43.654 6.3,44.8 6.3,45.4 6.5,45.6 IC1.53@7.74,45.6
SPI_MISO: IC1.44 IC8.11 | length 11.3
  L1 w0.15: v1(9,37.6) 9,37.1 9.875,36.225 IC8.11@12.2,36.225
  L4 w0.15: v1(9,37.6) 9,38.5 8.1,39.4 8.1,40.3 9.1,41.3 10.2,41.3 10.54,41.64 IC1.44@10.54,42.8
SPI_MISO1: IC1.45
SPI_MISO2: IC1.46
SPI_MISO3: IC1.47
SPI_MOSI: IC1.49 IC8.12 | length 12.5
  L1 w0.15: v1(8.2,38.3) 9.5,38.3 10.925,36.875 IC8.12@12.2,36.875
  L4 w0.15: IC1.49@7.74,44 7.715,43.975 6.975,43.975 6.2,43.2 6.2,41.6 7.1,40.7 7.1,38.9 7.7,38.3 v1(8.2,38.3)
STAT_LED: IC1.54 R1.2 | length 22.4
  L3 w0.15: v1(15.5,53.8) 15.5,52.4 15.6,52.3 v1(15.6,43.3)
  L4 w0.15: IC1.54@7.74,46 8.6,46 8.8,45.8 8.8,44.2 9.1,43.9 15,43.9 v1(15.6,43.3) ; R1.2@14.94,55.471 14.94,54.36 v1(15.5,53.8)
TCK: IC1.16 J1.1 | length 22.9
  L1 w0.152: J1.1@9.86,69.965 9.86,69.858 10.251,69.467 10.251,69.283 v1(10.317,69.216) ; v1(12.317,63.794) 14.367,63.794 v1(14.39,63.817)
  L4 w0.152: v1(10.317,69.216) 10.317,68.2 10.5,68.017 10.5,65.611 v1(12.317,63.794) ; v1(14.39,63.817) 15.281,62.926 15.281,58.912 14.33,57.961 14.33,53.86 14.94,53.25 IC1.16@14.94,51.2
TDI: IC1.15 J1.9 | length 24
  L1 w0.152: J1.9@11.13,71.235 11.633,71.739 11.633,71.833 v1(11.7,71.9)
  L4 w0.152: v1(11.7,71.9) 10.8,71 10.8,67.9 11.5,67.2 11.5,66.112 13.412,64.2 13.412,63.191 13.842,62.761 13.842,60.299 13.841,60.298 13.841,58.941 13.3,58.4 13.3,57.412 13.9,56.812 13.9,53.895 14.54,53.255 IC1.15@14.54,51.2
TDO: IC1.17 J1.3 | length 23.6
  L1 w0.152: v1(12.145,69.246) 12.145,69.34 12.276,69.472 12.276,69.841 J1.3@12.4,69.965
  L4 w0.152: v1(12.145,69.246) 11.8,68.901 11.8,67.8 12.4,67.2 12.4,66.6 15.7,63.3 15.7,56.4 16.4,55.7 16.4,53.2 17.593,52.007 17.593,50.881 16.814,50.102 16.814,50.024 16.79,50 IC1.17@16.14,50
TMS: IC1.14 J1.5 | length 29.1
  L1 w0.152: v1(11,66.9) 12.8,66.9 13.4,66.3 15.169,66.3 16.219,67.35 16.219,68.13 17.163,69.075 17.163,69.979 16.605,70.537 15.512,70.537 J1.5@14.94,69.965
  L4 w0.152: v1(11,66.9) 11,66.043 13.133,63.91 13.133,63.076 13.563,62.646 13.563,60.415 13.562,60.414 13.562,59.362 13,58.8 13,57.033 13.5,56.533 13.5,53.7 14.14,53.06 IC1.14@14.14,51.2
TRG: J4.7 J9.7 | length 19.2
  L1 w0.152: J9.7@4,55.8 6.5,55.8 6.75,55.55 6.75,54.55 7,54.3 8.5,54.3 9.7,53.1 15.5,53.1 16.65,54.25 16.65,54.35 17.25,54.95 17.25,55.55 17.5,55.8 J4.7@20,55.8
Vref+: R17.2 R18.1 R25.2 R36.1 | length 19.3
  L1 w0.4: R36.1@21.4,17.93 21.42,17.93 21.51,17.84 21.51,17.834 21.744,17.6 v1(22.5,17.6)
  L4 w0.4: R25.2@7.5,17 7.775,16.725 7.775,16.325 8.4,15.7 13.9,15.7 14.525,16.325 14.525,16.725 R17.2@14.8,17 15.8,17 16.7,16.1 21,16.1 21.6,16.7 R18.1@21.6,17.6 v1(22.5,17.6)
Vref-: R23.2 R24.1 R35.2 R38.1 | length 18.8
  L1 w0.4: v1(16.3,18.3) 16.64,17.96 R38.1@17.2,17.96
  L4 w0.4: R35.2@1.9,17 2.175,17.275 2.175,17.675 2.8,18.3 8.3,18.3 8.925,17.675 8.925,17.275 R23.2@9.2,17 9.475,17.275 9.475,17.675 10.1,18.3 v1(16.3,18.3) 16.7,17.9 16.75,17.9 17,17.65 R24.1@17,17.6
VREF_5V0: C23.1 C26.1 R12.1 R18.2
pads on no net: IC1.FTG1 IC1.FTG2 IC2.4 IC3.5 IC7.4 IC8.9 IC8.10 IC8.15 IC8.19 IC8.20 J1.6 J1.7 J1.8 J1.Mech

## Polygon pours and split planes (outlines as drawn)
GND on L3 "GND_L03_P028" (solid, remove dead copper, pour order 28): 22.5,60.3 22.5,60.8 22.5,70.3 24,70.3 24,73.4 24,76.5 0,76.5 0,73.4 0,70.3 1.5,70.3 1.5,60.8 1.5,60.3 1.5,55.8 1.5,43.2 0.2,43.2 0.2,0.2 23.8,0.2 23.8,43.2 22.5,43.2 22.5,55.8
P12V0 on L3 "P12V0_L03_P019" (solid, pour order 19): 6.32,66.88 5.9,67.3 5.9,70.8 6.6,71.5 7.3,72.2 16.7,72.2 17.4,71.5 18.2,70.7 18.2,67.7 17.3,66.8 17.3,65.8 17.4,65.7 17.9,65.7 18,65.8 20.6,65.8 21.9,67.1 21.9,74.5 20.2,76.2 3.7,76.2 2.1,74.6 2.1,67.1 3.4,65.8 5,65.8 5.3,65.5 6.6,65.5 6.723,65.623 6.723,66.477
P6V0A on L4 "P6V0A_L04_P049" (solid, pour order 49): 15,28.6 14.7,28.9 14.7,31.3 15,31.6 16.7,31.6 17.2,31.1 17.2,28.6
P5V0A on L4 "P5V0A_L04_P044" (solid, pour order 44): 20.78,25.59 22.01,25.59 22.35,25.25 22.85,25.25 23.2,25.6 23.2,27.7 23,27.9 21.9,27.9 21.7,27.7 21.7,26.55 21.36,26.21 20.78,26.21
GND on L4 "GND_L04_P038" (solid, pour order 38): 9.416,30.78 9.46,30.825 9.46,32.41 8.975,32.895 8.975,33.8 8.025,33.8 8.025,31.175 8.41,30.79 9.46,30.79
P5V0AVDD on L4 "P5V0AVDD_L04_P036" (solid, pour order 36): 22.35,21.25 22.35,21.74 21.5,22.59 19.94,22.59 19.94,23.465 20.175,23.7 20.175,25.1 19.84,25.435 19.84,26.21 20.42,26.21 20.42,25.59 20.91,25.1 22,25.1 22.85,24.25 22.85,21.25
VREF_5V0 on L4 "VREF_5V0_L04_P034" (solid, pour order 34): 19.55,17.1 19.55,19.075 20.175,19.7 20.175,21.355 19.94,21.59 19.94,22.21 21.5,22.21 21.51,22.22 21.51,19.11 20.45,18.05 20.45,17.1
P5V0A on L4 "P5V0A_L04_P033" (solid, pour order 33): 19.665,12.225 21.535,12.225 21.535,14.065 21.76,14.29 21.76,14.91 20.11,14.91 19.665,14.465 19.665,13.775
GND on L4 "GND_L04_P032" (solid, pour order 32): 20.175,5.2 20.265,5.29 20.265,8.375 18.395,8.375 18.395,5.505 18.7,5.2
P5V0 on L4 "P5V0_L04_P031" (solid, pour order 31): 22.9,39.6 19.45,39.6 19.25,39.4 19.25,37.225 19.175,37.15 18.225,37.15 18.225,37.975 17.6,38.6 15.4,38.6 15.4,39.9 17.7,39.9 18.1,40.3 18.1,41.8 18.4,42.1 19.2,42.1 19.5,41.8 19.5,40.5 19.6,40.4 20.4,40.4 20.6,40.6 20.6,41.6 20.9,41.9 23,41.9 23.2,41.7 23.2,39.9
GND on L4 "GND_L04_P029" (solid, remove dead copper, pour order 29): 0.245,72.4 2,72.4 2,69.8 6.1,69.8 6.1,59.2 1.971,59.2 1.971,55.3 6.1,55.3 6.1,43.1 0.245,43.1 0.245,0.1 23.845,0.1 23.845,43.1 18.045,43.1 18.045,55.3 22.045,55.3 22.045,59.2 17.871,59.2 17.871,69.8 22,69.8 22,72.4 23.845,72.4 23.845,73.95 23.845,76.2 0.245,76.2
P1V8 on L1 "P1V8_L01_P048" (solid, pour order 48): 3.35,37.09 4.79,37.09 4.9,37.2 4.9,39.2 4.75,39.35 3.35,39.35
P3V3 on L1 "P3V3_L01_P047" (solid, pour order 47): 21.85,35.29 21.94,35.2 23.3,35.2 23.4,35.3 23.4,37.4 23.25,37.55 21.85,37.55
GND on L1 "GND_L01_P045" (solid, pour order 45): 9.55,20.55 10.175,21.175 11.475,21.175 11.475,22.125 10.525,22.125 10.4,22 6.3,22 6.175,22.125 5.225,22.125 5.225,21.175 6.525,21.175 7.15,20.55 7.15,19.65 7.4,19.65 9.55,19.65
P6V0A on L1 "P6V0A_L01_P042" (solid, pour order 42): 15.75,32.15 14.95,32.15 14.6,31.8 14.6,30.5 14.9,30.2 16.75,30.2 16.75,31.65 17.4,32.3 17.4,32.7 16.3,32.7
P5V0A on L1 "P5V0A_L01_P041" (solid, pour order 41): 19.6,33.2 21.95,33.2 22,33.25 23,33.25 23,32.25 23.2,32.05 23.2,26.5 22.95,26.25 21.75,26.25 21.75,31.95 20.8,32.9 19.6,32.9
GND on L1 "GND_L01_P040" (solid, pour order 40): 20.65,35.1 20.89,34.86 22.89,34.86 23,34.75 23,33.75 22,33.75 21.51,34.24 20.74,34.24 20.4,33.9 19.6,33.9 19.35,33.65 19.35,32.08 19.75,31.68 19.75,30.2 17.25,30.2 17.25,31.68 17.65,32.08 17.65,35.22 17.48,35.39 17.48,36.01 18.06,36.01 18.06,35.39 18.35,35.1
P5V0AVDD on L1 "P5V0AVDD_L01_P039" (solid, pour order 39): 13,34.5 13.3,34.8 13.3,35.5 13.5,35.7 14.1,35.7 14.3,35.5 14.3,33.73 14.11,33.54 13.49,33.54 13.35,33.4 11.45,33.4 11.45,33.85 13.15,33.85 13.2,33.9 13.2,34 13.15,34.05 11.45,34.05 11.45,34.5
GND on L1 "GND_L01_P037" (solid, pour order 37): 4.26,33.81 4.5,34.05 7.15,34.05 7.15,34.5 4.45,34.5 4.26,34.69 4.26,35.31 3.64,35.31 3.64,35 3.065,34.425 1.8,34.425 1.8,32 2.1,31.7 3.375,31.7 3.375,32.7 3.865,33.19 4.26,33.19
GND on L1 "GND_L01_P035" (solid, pour order 35): 12.525,21.175 13.825,21.175 14.45,20.55 14.45,19.65 14.7,19.65 16.85,19.65 16.85,20.55 17.625,21.325 18.8,21.325 18.8,22.275 17.8,22.275 17.525,22 13.6,22 13.475,22.125 12.525,22.125
GND on L1 "GND_L01_P030" (solid, remove dead copper, pour order 30): 6.1,44.8 1.521,44.8 1.521,43.2 0.2,43.2 0.2,0.2 23.8,0.2 23.8,43.2 22.5,43.2 22.5,44.8 17.9,44.8 17.9,57.3 22,57.3 22,59.3 17.9,59.3 17.9,72.4 24,72.4 24,73.4 24,76.5 0,76.5 0,73.4 0,72.3 6.1,72.3 6.1,59.3 2,59.3 2,57.3 6.1,57.3
P5V0 on L1 "P5V0_L01_P022" (solid, pour order 22): 22,68.8 17.9,68.8 17.8,68.9 17.4,68.9 17.3,68.8 17.3,67.8 17.4,67.7 17.9,67.7 18,67.8 22,67.8
P5V0 on L1 "P5V0_L01_P021" (solid, pour order 21): 2,67.8 6.1,67.8 6.2,67.7 6.6,67.7 6.7,67.8 6.7,68.8 6.6,68.9 6.1,68.9 6,68.8 2,68.8
P12V0 on L1 "P12V0_L01_P020" (solid, pour order 20): 2,69.8 2,74.5 3.4,75.9 20.5,75.9 22,74.4 22,69.8 18,69.8 18,73 16.2,74.8 7.8,74.8 6,73 6,69.8
P12V0 on L1 "P12V0_L01_P018" (solid, pour order 18): 22,66.8 17.9,66.8 17.8,66.9 17.4,66.9 17.3,66.8 17.3,65.8 17.4,65.7 17.9,65.7 18,65.8 22,65.8
P12V0 on L1 "P12V0_L01_P017" (solid, pour order 17): 2,65.8 6.1,65.8 6.2,65.7 6.6,65.7 6.7,65.8 6.7,66.8 6.6,66.9 6.1,66.9 6,66.8 2,66.8
P5V0 on L1 "P5V0_L01_P015" (solid, pour order 15): 4.7,41.1 12.8,41.1 14.8,39.1 19.1,39.1 19.4,39.4 19.4,40.8 19.1,41.1 16,41.1 13.99,43.11 9.69,43.11 3.34,43.11 3.34,40.86 3.35,40.85 4.45,40.85
P5V0 on L1 "P5V0_L01_P014" (solid, pour order 14): 21.85,39.05 21.84,39.06 21.84,41.31 22.99,41.31 23.2,41.1 23.2,39.3 22.95,39.05
GND on L1 "GND_L01_P013" (solid, pour order 13): 21.56,35.29 21.7,35.43 21.7,37.9 21.8,38 21.8,38.8 21.56,39.04 21.56,41.31 20.94,41.31 20.9,41.27 20.9,39.05 20.6,38.75 20.6,37.9 20.8,37.7 20.8,35.43 20.94,35.29
GND on L1 "GND_L01_P012" (solid, pour order 12): 3.06,37.09 3.2,37.23 3.2,39.7 3.3,39.8 3.3,40.6 3.06,40.84 3.06,43.11 2.44,43.11 2.4,43.07 2.4,40.85 2.1,40.55 2.1,39.7 2.3,39.5 2.3,37.23 2.44,37.09
GND on P2 (split plane): 317 vertices, not listed, extent 0.602,0.602 23.398,75.898

## Keep-outs
KeepOutLayer:
  circle w0.1: c8.59,70.6 r0.7
  circle w0.1: c16.21,69.584 r0.7
  circle w0.1: c16.21,71.616 r0.7
  circle w0.1: c14.305,68.06 r1.421
  circle w0.1: c8.59,68.06 r1.421
  circle w0.1: c14.305,73.14 r1.421
  circle w0.1: c8.59,73.14 r1.421
  lines w0.05: 0,59.3 1.503,59.3 1.503,65 ; 0.9,69.3 0,69.3 ; 1.5,65.6 1.5,68.4 ; 1.5,69.3 0,69.3 ; 0,69.3 0,69.3

## Silkscreen, mask and mechanical layers (free items; w line width, h text height)
TopOverlay:
  lines w0.1: 17,55.8 18.4,57.2 21.7,57.2
  text "ID" at 15.137,64.922 h1.52
  text "3" at 6.954,61.754 h1.52
  text "0" at 15.454,61.754 h1.52
  text "ID1" at 11.7,52.65 h0.6 r90
  text "P12V0" at 17.193,52.593 h0.6 r90
  text "ID3" at 9.29,52.45 h0.6 r90
  text "ID2" at 10.49,52.45 h0.6 r90
  text "ID0" at 13.055,52.45 h0.6 r90
  text "P5V0" at 7.95,51.75 h0.6 r90
  text "STAT" at 14.655,51.05 h0.6 r90
  text "P3V3" at 18.15,40.75 h0.6
  text "Thermometer / ADC" at 3.8,39.8 h1.5
  text "v1.0" at 13.4,37 h1.52
  text "Iexc" at 21,14.6 h0.6
  text "SENS / P" at 20.451,10.9 h0.6
  text "SENS / N" at 20.351,8.2 h0.6
  text "Iexc / RET" at 21,5.7 h0.6
Mechanical1:
  the board outline again, w0.15

## Text inside footprints (layer, text, board x,y; h text height)
SW2: TopOverlay "1" at 7.523,60.025 h1